# Altium PCB Copy of Synthesizer.PcbDoc
Units mm, origin at the board's own origin, x right, y up, seen from the top; angles counter-clockwise.
Board outline 62.91 x 80 mm, 2 copper layers (Top, Bottom), stack 1.536 mm thick; 36 components, 23 nets, 164 pads, 60 vias.
Unrouted connection lines stored in the file: 1.
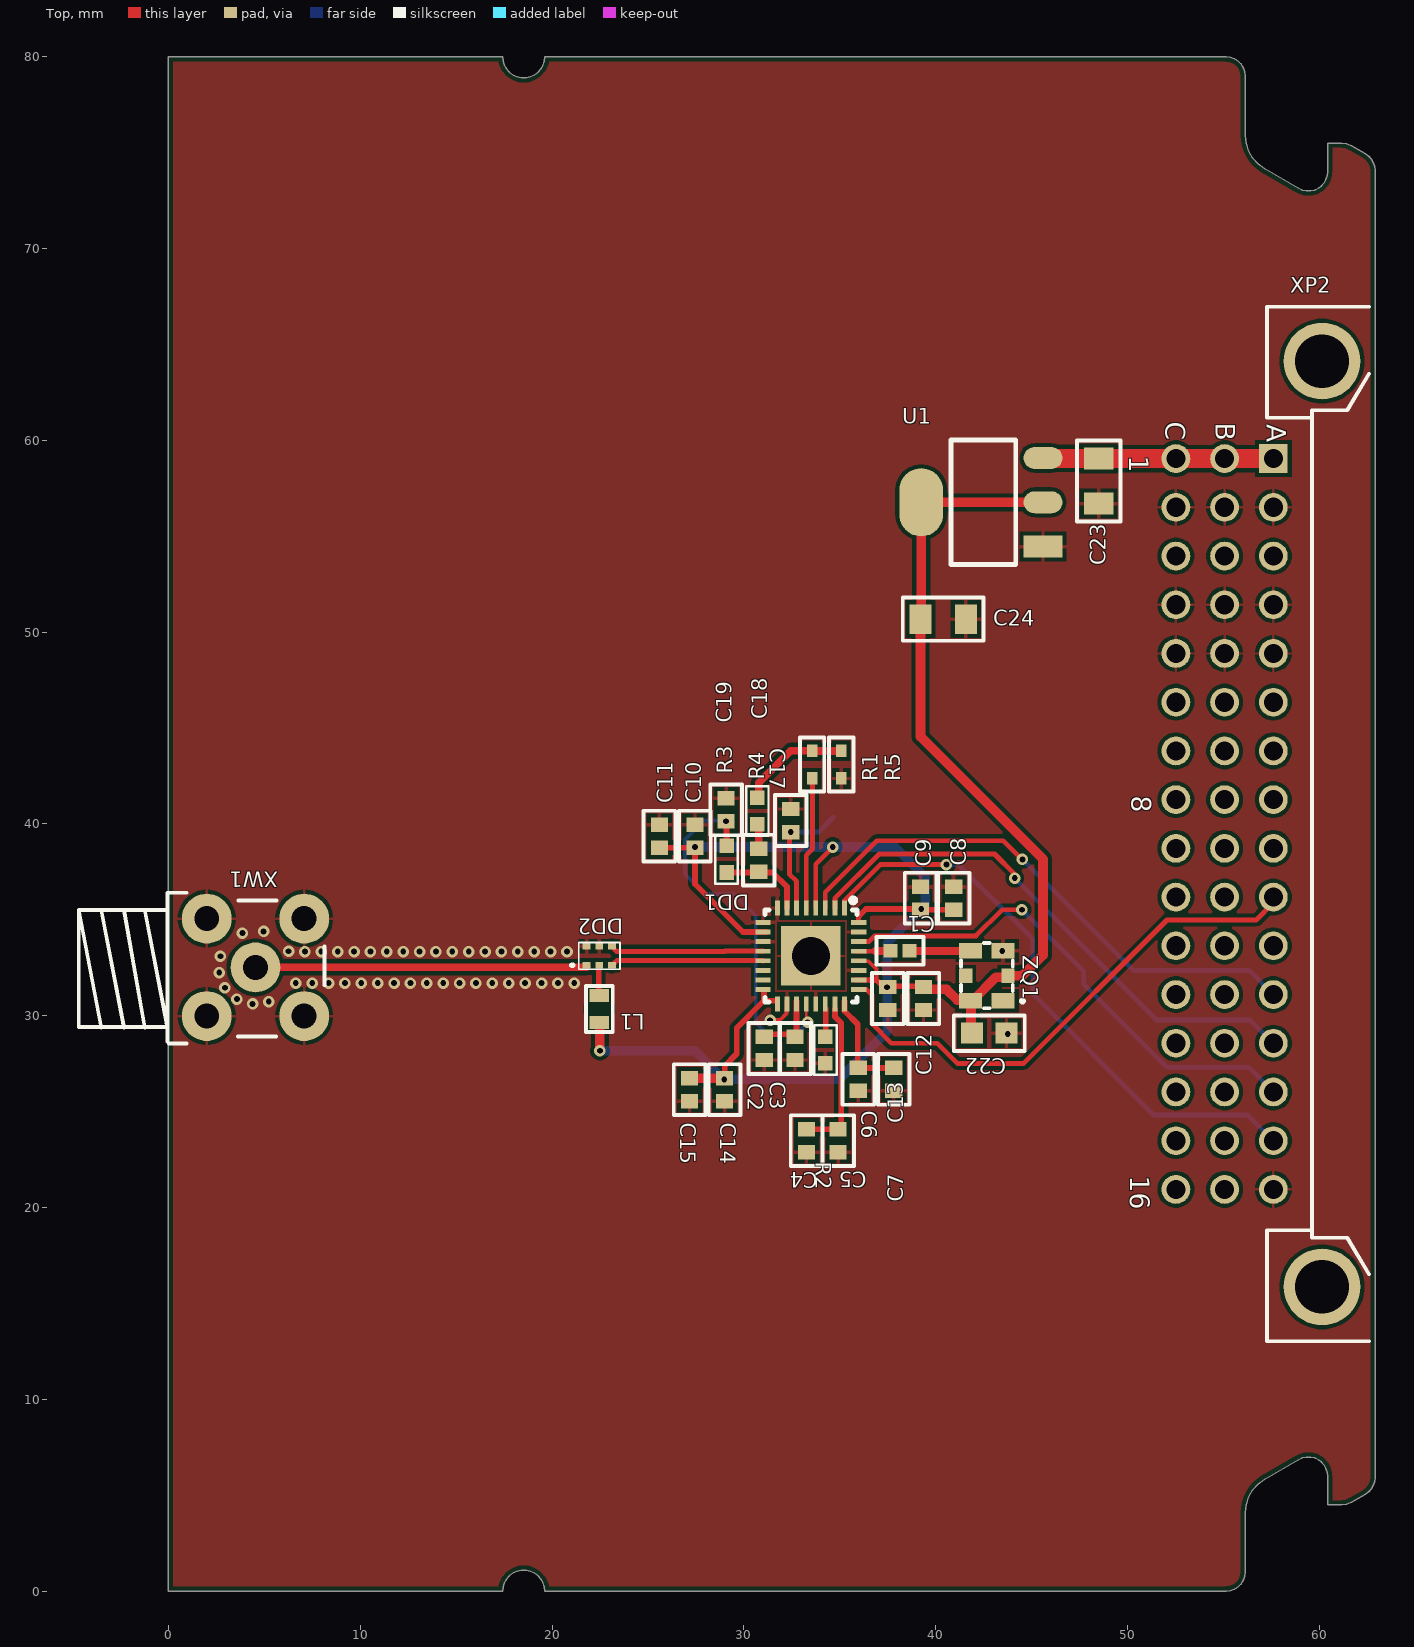
[diagram p0: Top view]
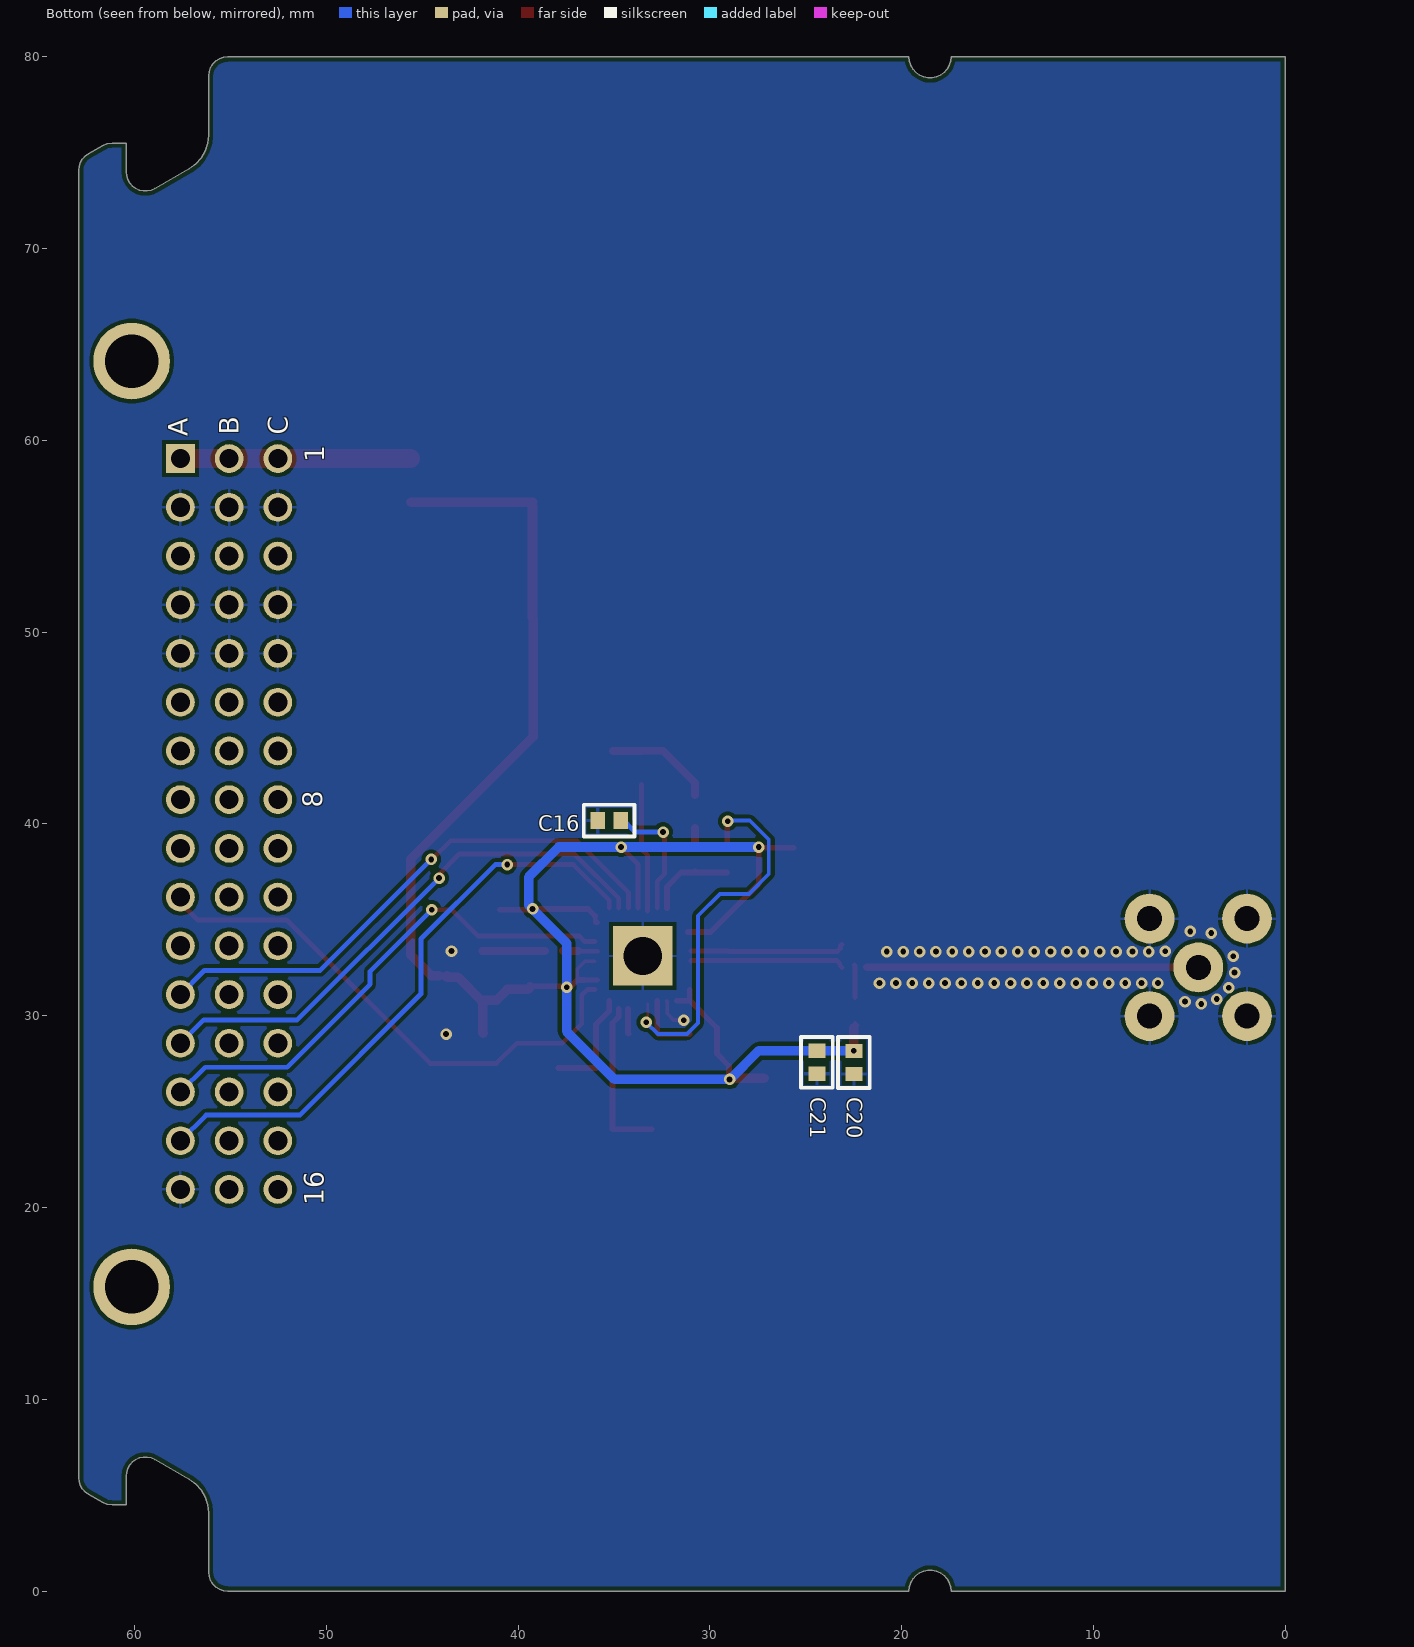
[diagram p1: Bottom view, seen from below]

## Layer stack, top to bottom
Top Solder: solder mask 0.0102, Solder Resist, Dk 3.5
Top: signal copper 0.018
Dielectric1: core 1.5, FR-4, Dk 4.8
Bottom: signal copper 0.018
Bottom Solder: solder mask 0.0102, Solder Resist, Dk 3.5

## Board outline
0,0 17.425,0 17.449,0.229 17.52,0.447 17.635,0.647 17.789,0.817 17.975,0.953 18.185,1.046 18.41,1.094 18.64,1.094 18.865,1.046 19.075,0.953 19.261,0.817 19.415,0.647 19.53,0.447 19.601,0.229 19.625,0 55.139,0 55.361,0.025 55.573,0.099 55.762,0.218 55.921,0.376 56.04,0.566 56.114,0.777 56.139,1 56.139,4.096 56.182,4.512 56.312,4.909 56.521,5.271 56.8,5.582 57.139,5.828 58.937,6.866 59.128,6.951 59.332,6.995 59.541,6.995 59.746,6.951 59.937,6.866 60.106,6.743 60.246,6.588 60.35,6.407 60.415,6.208 60.437,6 60.437,4.5 61.169,4.5 61.428,4.534 61.669,4.634 62.407,5.06 62.576,5.183 62.716,5.338 62.82,5.519 62.885,5.718 62.907,5.926 62.907,74.074 62.885,74.282 62.82,74.481 62.716,74.662 62.576,74.817 62.407,74.94 61.669,75.366 61.428,75.466 61.169,75.5 60.437,75.5 60.437,74 60.415,73.792 60.35,73.593 60.246,73.412 60.106,73.257 59.937,73.134 59.746,73.049 59.541,73.005 59.332,73.005 59.128,73.049 58.937,73.134 57.139,74.172 56.8,74.418 56.521,74.729 56.312,75.091 56.182,75.488 56.139,75.904 56.139,79 56.114,79.223 56.04,79.434 55.921,79.624 55.762,79.782 55.573,79.901 55.361,79.975 55.139,80 19.625,80 19.601,79.771 19.53,79.553 19.415,79.353 19.261,79.183 19.075,79.047 18.865,78.954 18.64,78.906 18.41,78.906 18.185,78.954 17.975,79.047 17.789,79.183 17.635,79.353 17.52,79.553 17.449,79.771 17.425,80 0,80

## Design rules (kind name [scope] priority, off if disabled: settings)
AcuteAngle [All] p1: minimum=3.50000000000000E+0001 checktracksonly=FALSE
BoardOutlineClearance "BoardOutlineClearance 1" [All] p1: gap=0.25 ignorepadtopadclearanceinfootprint=FALSE except(0: Arc-SplitContinuation Track-SplitContinuation SMDPad-SplitContinuation THPad-SplitContinuation Via-SplitContinuation Fill-SplitContinuation Poly-SplitContinuation Region-SplitContinuation Text-SplitContinuation) // Milling
BoardOutlineClearance "BoardOutlineClearance 2" [All] p2: gap=0.4 ignorepadtopadclearanceinfootprint=FALSE except(0: Arc-SplitContinuation Track-SplitContinuation SMDPad-SplitContinuation THPad-SplitContinuation Via-SplitContinuation Fill-SplitContinuation Poly-SplitContinuation Region-SplitContinuation Text-SplitContinuation) // V-Cut
Clearance "Clearance-1 1 Oz 35mkm" [All] p1 off: gap=0.2 ignorepadtopadclearanceinfootprint=FALSE except(0.25: Arc-Hole Track-Hole SMDPad-Hole THPad-Hole Via-Hole Fill-Hole Poly-Hole Region-Hole Text-Hole) // Standart
Clearance "Clearance-1 1/2 Oz 18mkm" [All] p2: gap=0.125 ignorepadtopadclearanceinfootprint=FALSE except(0.2: Arc-Fill Arc-Poly Track-Fill Track-Poly SMDPad-SMDPad SMDPad-Fill SMDPad-Poly THPad-Fill THPad-Poly Via-Fill Via-Poly Fill-Fill Fill-Poly Poly-Poly Poly-Region Poly-Text; 0.25: Arc-Hole Track-Hole SMDPad-Hole THPad-Hole Via-Hole Fill-Hole Poly-Hole Region-Hole Text-Hole) // Standart
DiffPairsRouting "DiffPairsRouting 1 Oz 35mkm" [All] p1 off: maxlimit=0.254 minlimit=0.2 mostfreqgap=0.254 toplayer_minwidth=0.2 toplayer_maxwidth=0.381 toplayer_prefwidth=0.381 bottomlayer_minwidth=0.2 bottomlayer_maxwidth=0.381 bottomlayer_prefwidth=0.381 maxuncoupledlength=12.7
DiffPairsRouting "DiffPairsRouting 1/2 Oz 18mkm" [All] p2: maxlimit=0.254 minlimit=0.125 mostfreqgap=0.254 toplayer_minwidth=0.125 toplayer_maxwidth=0.381 toplayer_prefwidth=0.381 bottomlayer_minwidth=0.125 bottomlayer_maxwidth=0.381 bottomlayer_prefwidth=0.381 maxuncoupledlength=12.7 // Standart
HoleSize "Minimum HoleSize" [IsPad] p1: absolutevalues=TRUE maxlimit=5.9 minlimit=0.6 maxpercent=80.000 minpercent=20.000
HoleSize "Minimum HoleSize VIA 1" [IsVia] p2: absolutevalues=TRUE maxlimit=5.9 minlimit=0.3 maxpercent=80.000 minpercent=20.000 // Standart
HoleSize "Minimum HoleSize VIA 2" [IsVia] p3 off: absolutevalues=TRUE maxlimit=5.9 minlimit=0.2 maxpercent=80.000 minpercent=20.000 // Advance
HoleToHoleClearance Hole2HoleClearance [All] p1: gap=0.25 allowstackedmicrovias=FALSE
MinimumAnnularRing "Minimum AR VIA Standart" [IsVia] p1: minimumring=0.15
MinimumAnnularRing "Minimum AR PAD Standart" [IsPAD] p2: minimumring=0.2
MinimumAnnularRing "Minimum AR VIA Advance" [IsVia] p3 off: minimumring=0.1
MinimumAnnularRing "Minimum AR PAD Advance" [IsPAD] p4 off: minimumring=0.15
MinimumSolderMaskSliver "SolderMask Bridge Standart" [All] p1: minsoldermaskwidth=0.14 // All Masks
MinimumSolderMaskSliver "SolderMask Bridge Advance" [All] p2 off: minsoldermaskwidth=0.1 // Mask LDI
PlaneClearance "PlaneClearance 1 Oz 35mkm" [All] p1 off: clearance=0.2
PlaneClearance "PlaneClearance-1 1/2 Oz 18mkm" [All] p2: clearance=0.2 // Standart
PlaneClearance "PlaneClearance-2 1/2 Oz 18mkm" [All] p3 off: clearance=0.15 // Advance
PlaneConnect "TermalConnect-1 1 Oz 35mkm" [All] p1 off: planeconnectstyle=Relief reliefexpansion=0.2 reliefentries=4 reliefconductorwidth=0.2 reliefairgap=0.2 // Standart
PlaneConnect "TermalConnect-2 1 Oz 35mkm" [All] p2 off: pad.planeconnectstyle=Relief pad.reliefexpansion=0.15 pad.reliefentries=4 pad.reliefconductorwidth=0.2 pad.reliefairgap=0.2 via.planeconnectstyle=Direct via.reliefexpansion=0.15 via.reliefentries=4 via.reliefconductorwidth=0.15 via.reliefairgap=0.15 // Advance
PlaneConnect "TermalConnect-1 1/2 Oz 18mkm" [All] p3: planeconnectstyle=Relief reliefexpansion=0.2 reliefentries=4 reliefconductorwidth=0.2 reliefairgap=0.2 // Standart
PlaneConnect "TermalConnect-2 1/2 Oz 18mkm" [All] p4 off: pad.planeconnectstyle=Relief pad.reliefexpansion=0.15 pad.reliefentries=4 pad.reliefconductorwidth=0.15 pad.reliefairgap=0.15 via.planeconnectstyle=Direct via.reliefexpansion=0.15 via.reliefentries=4 via.reliefconductorwidth=0.15 via.reliefairgap=0.15 // Advance
PolygonConnect "PolygonConnect-1 1 Oz 35mkm" [All] p1 off: thpad.connectstyle=Relief thpad.reliefconductorwidth=0.2 thpad.reliefentries=4 thpad.polygonreliefangle="90 Angle" thpad.airgapwidth=0.2 smdpad.connectstyle=Relief smdpad.reliefconductorwidth=0.2 smdpad.reliefentries=4 smdpad.polygonreliefangle="90 Angle" smdpad.airgapwidth=0.2 via.connectstyle=Direct via.reliefconductorwidth=0.254 via.reliefentries=4 via.polygonreliefangle="90 Angle" via.airgapwidth=0.254 // Standart
PolygonConnect "PolygonConnect-2 1 Oz 35mkm" [All] p2 off: thpad.connectstyle=Relief thpad.reliefconductorwidth=0.15 thpad.reliefentries=4 thpad.polygonreliefangle="90 Angle" thpad.airgapwidth=0.15 smdpad.connectstyle=Relief smdpad.reliefconductorwidth=0.15 smdpad.reliefentries=4 smdpad.polygonreliefangle="90 Angle" smdpad.airgapwidth=0.15 via.connectstyle=Direct via.reliefconductorwidth=0.254 via.reliefentries=4 via.polygonreliefangle="90 Angle" via.airgapwidth=0.254 // Advance
PolygonConnect "PolygonConnect-1 1/2 Oz 18mkm" [All] p3: thpad.connectstyle=Relief thpad.reliefconductorwidth=0.15 thpad.reliefentries=4 thpad.polygonreliefangle="90 Angle" thpad.airgapwidth=0.2 smdpad.connectstyle=Relief smdpad.reliefconductorwidth=0.2 smdpad.reliefentries=4 smdpad.polygonreliefangle="90 Angle" smdpad.airgapwidth=0.2 via.connectstyle=Direct via.reliefconductorwidth=0.254 via.reliefentries=4 via.polygonreliefangle="90 Angle" via.airgapwidth=0.254 // Standart
PolygonConnect "PolygonConnect-2 1/2 Oz 18mkm" [All] p4 off: thpad.connectstyle=Relief thpad.reliefconductorwidth=0.125 thpad.reliefentries=4 thpad.polygonreliefangle="90 Angle" thpad.airgapwidth=0.15 smdpad.connectstyle=Relief smdpad.reliefconductorwidth=0.125 smdpad.reliefentries=4 smdpad.polygonreliefangle="90 Angle" smdpad.airgapwidth=0.15 via.connectstyle=Direct via.reliefconductorwidth=0.254 via.reliefentries=4 via.polygonreliefangle="90 Angle" via.airgapwidth=0.254 // Advance
RoomDefinition Synthesizer [InComponentClass('Synthesizer')] p1: confinementstyle=ConfineIn formatcopy=TRUE lockcomponents=FALSE outline -920.36,-680.748 -869.56,-680.748 -869.56,-655.348 -920.36,-655.348
RoutingCorners [All] p1 off: cornerstyle=45-Degree minsetback=2.54 maxsetback=2.54
RoutingVias [All] p1: holewidth=0.3 width=0.6 viastyle="Through Hole" minholewidth=0.2 minwidth=0.4 maxholewidth=5.9 maxwidth=6.4
SilkToSilkClearance Silk2SilkClearance [All] p1 off: silktosilkclearance=0.15
SilkToSolderMaskClearance Silk2SolderMaskClearance [IsPad] p1 off: minsilkscreentomaskgap=0.15 clearancetoexposedcopper=TRUE
SolderMaskExpansion SolderMaskExpansion-1 [All] p1: expansion=0.05 istentingtop=FALSE // Standart
SolderMaskExpansion "SolderMaskExpansion LDI" [All] p2 off: expansion=0.025 istentingtop=FALSE // Advance
Width "Width 1 Oz 35mkm" [All] p1 off: maxlimit=10 minlimit=0.15 preferedwidth=0.2 checkconnectedcopper=TRUE // Standart
Width "Width 1/2 Oz 18mkm" [All] p2: maxlimit=10 minlimit=0.1 preferedwidth=0.125 checkconnectedcopper=TRUE // Standart
21 further rules are at their usual default settings.

## Classes and differential pairs
net class 50_Om: NetDD2_1 RFOutA_N RFOutA_P
differential pair RFOutA: +RFOutA_P -RFOutA_N

## Components (designator, comment, footprint, x,y, rotation, side; value= is the part's Value field where it differs from the comment)
C1 "Capacitors" "SMD 0402 (1005) max" 38.145,33.39 r180 top value=100pF
C2 "Capacitors" "SMD 0603 (1608) min" 31.07,28.298 r270 top value=0.1uF
C3 "Capacitors" "SMD 0603 (1608) min" 32.67,28.298 r270 top value=10pF
C4 "Capacitors" "SMD 0603 (1608) min" 33.271,23.49 r270 top value=0.1uF
C5 "Capacitors" "SMD 0603 (1608) min" 34.915,23.49 r270 top value=10pF
C6 "Capacitors" "SMD 0603 (1608) min" 35.971,26.684 r270 top value=0.1uF
C7 "Capacitors" "SMD 0603 (1608) min" 37.815,26.684 r270 top value=10pF
C8 "Capacitors" "SMD 0603 (1608) min" 40.944,36.133 r90 top value=0.1uF
C9 "Capacitors" "SMD 0603 (1608) min" 39.212,36.133 r270 top value=10pF
C10 "Capacitors" "SMD 0603 (1608) min" 27.451,39.363 r90 top value=0.1uF
C11 "Capacitors" "SMD 0603 (1608) min" 25.598,39.365 r270 top value=10pF
C12 "Capacitors" "SMD 0603 (1608) min" 39.364,30.902 r270 top value=0.1uF
C13 "Capacitors" "SMD 0603 (1608) min" 37.51,30.902 r90 top value=10pF
C14 "Capacitors" "SMD 0603 (1608) min" 28.998,26.152 r270 top value=0.1uF
C15 "Capacitors" "SMD 0603 (1608) min" 27.171,26.152 r90 top value=10pF
C16 "Capacitors" "SMD 0603 (1608) min" 35.25,40.179 r0 bottom value=0.1uF
C17 "Capacitors" "SMD 0603 (1608) min" 32.446,40.179 r270 top value=10pF
C18 "Capacitors" "SMD 0603 (1608) min" 30.778,38.119 r90 top value=39nF
C19 "Capacitors" "SMD 0603 (1608) min" 29.076,40.743 r270 top value=1200pF
C20 "Capacitors" "SMD 0603 (1608) min" 22.491,27.567 r270 bottom value=0.1uF
C21 "Capacitors" "SMD 0603 (1608) min" 24.422,27.577 r90 bottom value=10nF
C22 "Capacitors" "SMD 0603 (1608) max" 42.794,29.097 r180 top value=0.1uF
C23 "VJ0805Y104KXBTW1BC" "0805 (2012)" 48.5,57.882 r90 top value=100nF
C24 "VJ0805V106ZXQTW1BC" "0805 (2012)" 40.392,50.68 r180 top value=10uF
DD1 "ADF4351BCPZ" "LFCSP-32  Long Pin - with VIA" 33.5,33.12 r270 top
DD2 "BD1631J50100AHF" 0805_a 22.466,33.124 r180 top
L1 "0603HP-18NXJE" 0603HP 22.466,30.356 r270 top
R1 "Resistor" "Resistor SMD 0603 (1608) min" 33.557,43.098 r270 top value=1R
R2 "4K7" 0603R-4K7 34.25,27.521 r90 top
R3 "680" 0603R-4K7 29.102,37.469 r90 top
R4 "120" 0603R-4K7 30.702,39.981 r90 top
R5 "Resistor" "Resistor SMD 0603 (1608) min" 35.081,43.098 r270 top value=360
U1 "LD1117S33TR" SOT-223 42.424,56.771 r90 top
XP2 "09 23 148 6921" "09 23 148 6921" 56.337,40 r270 top locked
XW1 "J01151A0201" J01151A0201 4.54,32.526 r90 top
ZQ1 "ГК1010-TK" DIL-8 42.674,32.093 r90 top

## Footprints (in the part's own frame and the unit in brackets; to place one, negate y for a bottom-side part, rotate by r counter-clockwise, add the part's x,y. Pads: shape width x height; smd on the part's side, far side on the other; paste and mask are expansions set on the pad)
"09 23 148 6921" [mm]
  rect 1.5x1.5 hole 1: a1(-19.05,1.27)
  round 1.5 hole 1: a2(-16.51,1.27) a3(-13.97,1.27) a4(-11.43,1.27) a5(-8.89,1.27) a6(-6.35,1.27) a7(-3.81,1.27) a8(-1.27,1.27) a9(1.27,1.27) a10(3.81,1.27) a11(6.35,1.27) a12(8.89,1.27) a13(11.43,1.27) a14(13.97,1.27) a15(16.51,1.27) a16(19.05,1.27) b1(-19.05,-1.27) b2(-16.51,-1.27) b3(-13.97,-1.27) b4(-11.43,-1.27) b5(-8.89,-1.27) b6(-6.35,-1.27) b7(-3.81,-1.27) b8(-1.27,-1.27) b9(1.27,-1.27) b10(3.81,-1.27) b11(6.35,-1.27) b12(8.89,-1.27) b13(11.43,-1.27) b14(13.97,-1.27) b15(16.51,-1.27) b16(19.05,-1.27) c1(-19.05,-3.81) c2(-16.51,-3.81) c3(-13.97,-3.81) c4(-11.43,-3.81) c5(-8.89,-3.81) c6(-6.35,-3.81) c7(-3.81,-3.81) c8(-1.27,-3.81) c9(1.27,-3.81) c10(3.81,-3.81) c11(6.35,-3.81) c12(8.89,-3.81) c13(11.43,-3.81) c14(13.97,-3.81) c15(16.51,-3.81) c16(19.05,-3.81)
  round 4 hole 2.8: MH(-24.13,3.81) MH(24.13,3.81)
  silkscreen extent -26.97,0.94 26.97,6.25, body extent -27.02,-4.1 26.98,13.92, height 9.45
0603HP [mm]
  rect 0.69x1.02 smd mask+0.04: 1(-0.7,0) 2(0.7,0)
  silkscreen extent -1.2,-0.7 1.2,0.7, body extent -0.87,-0.54 0.88,0.55, height 0.93
0603R-4K7 [mil] "RESISTOR 0603"
  rect 30x30 smd: 1(0,0) 2(55,0)
  silkscreen extent -23,-23 78,23, body extent -4,-15 59,15, height 20
"0805 (2012)" [mm]
  rect 1.15x1.55 smd: 1(-1.18,0) 2(1.18,0)
  silkscreen extent -2.11,-1.13 2.11,1.13, body extent -0.99,-0.62 1.01,0.62, height 1.3
0805_a [mm]
  rect 0.41x0.33 smd mask+0.05: 1(0.66,0.495) 2(0,0.495) 3(-0.66,0.495) 4(-0.66,-0.495) 5(0,-0.495) 6(0.66,-0.495)
  silkscreen extent -1.07,-0.7 1.43,0.7, body extent -1.02,-0.64 1.02,0.64, height 0.68
DIL-8 [mm]
  rect 0.8x1.2 smd mask+0.01: 1(-1.305,-0.85) 3(1.305,-0.85) 4(1.305,0.85) 6(-1.305,0.85)
  rect 0.75x0.7 smd mask+0.01: 2(0,-1.1) 5(0,1.1)
  silkscreen extent -1.7,-1.92 1.7,1.35, body extent -1.6,-1.25 1.6,1.25, height 1.64
J01151A0201 [mm]
  round 2.6 hole 1.3: 1(0,0) 2(-2.54,-2.54) 2(-2.54,2.54) 2(2.54,-2.54) 2(2.54,2.54)
  silkscreen extent -3.97,-3.59 3.89,9.21, body extent -5.17,-3.5 5.03,35.78, height 10.85
"LFCSP-32  Long Pin - with VIA" [mm]
  rect 0.8x0.25 smd mask+0.05: 1(-2.5,1.75) 2(-2.5,1.25) 3(-2.5,0.75) 4(-2.5,0.25) 5(-2.5,-0.25) 6(-2.5,-0.75) 7(-2.5,-1.25) 8(-2.5,-1.75) 17(2.5,-1.75) 18(2.5,-1.25) 19(2.5,-0.75) 20(2.5,-0.25) 21(2.5,0.25) 22(2.5,0.75) 23(2.5,1.25) 24(2.5,1.75)
  rect 0.25x0.8 smd mask+0.05: 9(-1.75,-2.5) 10(-1.25,-2.5) 11(-0.75,-2.5) 12(-0.25,-2.5) 13(0.25,-2.5) 14(0.75,-2.5) 15(1.25,-2.5) 16(1.75,-2.5) 25(1.75,2.5) 26(1.25,2.5) 27(0.75,2.5) 28(0.25,2.5) 29(-0.25,2.5) 30(-0.75,2.5) 31(-1.25,2.5) 32(-1.75,2.5)
  rect 3.1x3.1 hole 2 mask+0.05: 33(0,0)
  silkscreen extent -3.03,-2.4 2.4,2.4, body extent -2.51,-2.51 2.51,2.51, height 0.8
"Resistor SMD 0603 (1608) min" [mm]
  rect 0.65x0.55 smd: 1(-0.725,0) 2(0.725,0)
  silkscreen extent -1.41,-0.64 1.41,0.64, body extent -0.8,-0.4 0.8,0.4, height 0.45
"SMD 0402 (1005) max" [mm]
  rect 0.72x0.72 smd: 1(-0.5,0) 2(0.5,0)
  silkscreen extent -1.22,-0.72 1.22,0.72, body extent -0.5,-0.25 0.5,0.25, height 0.5
"SMD 0603 (1608) max" [mm]
  rect 1.15x1.1 smd: 1(-0.9,0) 2(0.9,0)
  silkscreen extent -1.85,-0.92 1.85,0.92, body extent -0.8,-0.4 0.8,0.4, height 0.5
"SMD 0603 (1608) min" [mm]
  rect 0.75x0.9 smd: 1(-0.6,0) 2(0.6,0)
  silkscreen extent -1.33,-0.82 1.33,0.82, body extent -0.8,-0.4 0.8,0.4, height 0.5
SOT-223 [mil]
  rect 45x80 smd: 1(-90.94,-125)
  oval 140x90 smd: 2(0,125)
  oval 45x80 smd: 2(0,-125) 3(90.94,-125)
  silkscreen extent -128,-69 128,64, body extent -128,-140 128,140, height 65

## Part data
C1 C2 C3 C4 C5 C6 C7 C8 C9 C10 C11 C12 C13 C14 C15 C16 C17 C18 C19 C20 C21 C22: "Capacitor", Tolerance=±10%, Category=Конденсаторы
C23: "Ceramic Capacitor  0.1uF 100V", Case/Package=0805, Dielectric=X7R, Dielectric Material=Tantalum, Manufacturer="Vishay Vitramon", Max Operating Temperature=125°C, Min Operating Temperature=-55°C, Supplier Part Number 1=2896560, Tolerance=10%, Voltage Rating (DC)=100V, Category=Конденсаторы, ComponentLink1Description=http://www.vishay.com/docs/28548/vjw1bcbascomseries.pdf, ComponentLink1URL=http://www.vishay.com/docs/28548/vjw1bcbascomseries.pdf, Depth=1.25mm, Lead Free="Lead Free", Length=2mm, Manufacturer Part Number=VJ0805Y104KXBTW1BC, Mount="Surface Mount", Packaging="Tape and Reel", Pricing 1="5=0.0806, 50=0.0509, 250=0.0369, 500=0.0317 (RUB)", Radiation Hardening=No, Stock 1=0, Supplier 1=Farnell, Разработчик="Богатов Алексей"
C24: "Ceramic Capacitors 10uF 10volts", Case/Package=0805, Dielectric=Y5V, Dielectric Material=Tantalum, Manufacturer="Vishay Vitramon", Max Operating Temperature=85°C, Min Operating Temperature=-30°C, Supplier Part Number 1=VJ0805V106ZXQTW1BC-ND, Tolerance=80%, Voltage Rating (DC)=10V, Category=Конденсаторы, ComponentLink1Description=http://www.vishay.com/docs/28548/vjw1bcbascomseries.pdf, ComponentLink1URL=http://www.vishay.com/docs/28548/vjw1bcbascomseries.pdf, Lead Free="Lead Free", Manufacturer Part Number=VJ0805V106ZXQTW1BC, Mount="Surface Mount", Pricing 1="3000=0.1089 (USD)", Stock 1=0, Supplier 1=Digi-Key, Разработчик="Богатов Алексей"
DD1: "Phase Locked Loops - PLL WB Synthesizer w/ Intg VCO", Case/Package=LFCSP-32, Frequency=4.4GHz, Manufacturer="Analog Devices", Max Operating Temperature=85°C, Min Operating Temperature=-40°C, Min Supply Voltage=3V, Nominal Supply Current=110mA, Operating Supply Voltage=3.3V, Category=Микросхемы, ComponentLink1Description=datasheet, ComponentLink1URL=https://www.analog.com/media/en/technical-documentation/data-sheets/ADF4351.pdf, ComponentLink2Description=Mouser, ComponentLink2URL=https://ru.mouser.com/ProductDetail/Analog-Devices/ADF4351BCPZ?qs=BpaRKvA4VqFCiUOrGPcIQw%3D%3D, Input=CMOS, Interface=SPI, Manufacturer Part Number=ADF4351BCPZ, Max Frequency=4.4GHz, PLL=Yes, Разработчик="Леткин Д.С."
DD2: "The BD1631J50100AHF is a low profile sub-miniature balanced to unbalanced / transformer designed for differential inputs and output locations on next generation / wireless chipsets in an easy to use surface mount package covering 802.11b+g+n, / GSM, DCS, PCS and UMTS.", Case Code (Imperial)=0805, Frequency="1.6 - 3.1GHz", Manufacturer=Anaren, Max Operating Temperature=85°C, Min Operating Temperature=-55°C, Category=Микросхемы, ComponentLink1Description=datasheet, ComponentLink1URL=https://cdn.anaren.com/product-documents/Xinger/BalunTransformers/BD1631J50100AHF/BD1631J50100AHF_DataSheet(Rev_K).pdf, ComponentLink2Description=Anaren, ComponentLink2URL=https://www.anaren.com/catalog/xinger/subminiature-components, Contact Plating=Gold, Impedance=100R, Insertion Loss=0.6dB, Manufacturer Part Number=BD1631J50100AHF, Number of Pins=6, Разработчик="Леткин Д.С."
L1: "Ceramic Chip Inductors", Manufacturer=Coilcraft, Category="Катушки индуктивности", ComponentLink1Description=datasheet, ComponentLink1URL=https://www.coilcraft.com/pdfs/0603hp.pdf, ComponentLink2Description=Coilcraft, ComponentLink2URL=https://www.coilcraft.com/0603hp.cfm, Manufacturer Part Number=0603HP-18NXJE, Разработчик="Леткин Д.С."
R1 R5: library part Resistors, Category=Резисторы
R2 R3 R4: library part 0603R-4K7, "GENERIC RESISTOR 0603", Manufacturer="Stackpole Electronics Inc", Manufacturer Part Number="RMCF 1/16 4.7K 1% R", Supplier Part Number 1=RMCF0603FT4K70TR-ND, Reel=R23, Supplier 1=Digi-Key
U1: library part LD1117S50TR, Base Part Number=LD1117, Current - Output=800mA, Manufacturer=STMicroelectronics, Operating Temperature="0°C ~ 125°C", Package / Case="TO-261-4, TO-261AA", Supplier Device Package=SOT-223, Supplier Part Number 1=497-6447-1-ND, Voltage - Input (Max)=15V, Voltage - Output (Max)=-, Voltage - Output (Min/Fixed)=5V, Voltage Dropout (Max)="1.2V @ 800mA", Category="Integrated Circuits (ICs)", ComponentLink1Description=http://www.st.com/content/ccc/resource/technical/document/datasheet/99/3b/7d/91/91/51/4b/be/CD00000544.pdf/files/CD00000544.pdf/jcr:content/translations/en.CD00000544.pdf, ComponentLink1URL=http://www.st.com/content/ccc/resource/technical/document/datasheet/99/3b/7d/91/91/51/4b/be/CD00000544.pdf/files/CD00000544.pdf/jcr:content/translations/en.CD00000544.pdf, Control Features=-, Manufacturer Part Number=LD1117S50TR, Mounting Type="Surface Mount", Output Configuration=Positive, Output Type=Fixed, Packaging="Cut Tape (CT)", Part Status=Active, Pricing 1="1=0.51, 10=0.411, 100=0.2802, 500=0.21012, 1000=0.15759 (USD)", Protection Features="Over Current, Over Temperature", PSRR="75dB (120Hz)", RoHS="RoHS Compliant", Stock 1=3876, Supplier 1=Digi-Key
XP2: "DIN-Signal 2C048MS-1C1-2", Current Rating=-, Manufacturer=HARTING, Manufacturer Part Number=09231486921, Material Flammability Rating="UL94 V-0", Category=Разъёмы, ComponentLink1Description=Datasheet, ComponentLink1URL=https://b2b.harting.com/files/download/PRD/PDF_DS/09031200201_100580147DRW000B.pdf, Connector Type="Header, Male Pins", Contact Finish=-, Contact Finish Thickness=-, Features=-, Function="просто так", HelpURL=https://b2b.harting.com/ebusiness/en_us/DIN-Signal-2C048MS-1C1-2/09231486921, Material - Insulation="Thermoplastic resin, Glass-fibre Filled", Mounting Type="Through Hole, Right Angle", Number of Contacts=48, Number of Positions Loaded=All, Operating Temperature=-, Packaging=Bulk, Packaging size=20, Part Status=Active, Pitch="0.100\" (2.54mm)", RoHS="RoHS Compliant", Style=C, Termination=Solder, Разработчик="Леткин Д."
XW1: "Telegartner Right Angle 50Ohm Thru Hole SMA Connector,  jack,  Solder Termination", Manufacturer=Telegartner, Supplier Part Number 1=70884022, Category=Разъёмы, ComponentLink1Description=https://www.alliedelec.com/m/d/98f426e0d5bb6ee5532bde4cab502770.pdf, ComponentLink1URL=https://www.alliedelec.com/m/d/98f426e0d5bb6ee5532bde4cab502770.pdf, ComponentLink2Description=https://www.alliedelec.com/-j01151a0201/70884022/, ComponentLink2URL=https://www.alliedelec.com/-j01151a0201/70884022/, Manufacturer Part Number=J01151A0201, Pricing 1="1=11.2500 (USD)", RoHS=No, Stock 1=509, Supplier 1=Allied
ZQ1: "Генераторы кварцевые программируемые", Case/Package="DIL 8", Manufacturer="БМГ ПЛЮС", Category=Фильтры, ComponentLink1Description=datasheet, ComponentLink1URL=http://bmgplus.ru/images/pdf/pdf1010_tcxo.pdf, Manufacturer Part Number=ГК1010-TK, Джиттер, пс=0,8, Нагрузка, пФ=15, Питание,В=3.3, Потребляемый ток, мA=35, Разработчик="Леткин Д.С.", Частота, МГц="10 - 250"

## Via types
v1: diameter 0.6, hole 0.3, Top to Bottom, tented both sides, 60 vias

## Nets (pads, with @x,y where several pads share a name; then routed paths per layer and width w, separated by ;. In a path a pad name is that pad's centre, name@x,y a point inside that pad or via, vN(x,y) a via of type N, cw(c..) or ccw(c..) an arc to the next point about the centre after c; other vN are vias at no path point)
+3.3V: C8.1 C9.2 C10.1 C11.2 C12.1 C13.2 C14.1 C15.2 C16.1 C17.2 C20.1 C21.2 C22.2 C24.2 DD1.4 DD1.6 DD1.10 DD1.16 DD1.17 DD1.26 DD1.28 DD1.32 L1.2 U1.2 ZQ1.2 ZQ1.6 | length 118.4
  Top w0.125: L1.2 22.415,29.656 22.261,29.502 22.368,29.502 L1.2@22.496,29.374 ; v1@22.496,28.172 v1(22.501,28.177) ; C24.2 C24.2@39.249,50.717
  Top w0.2: DD1.28@36.025,32.845 36.506,32.845 36.916,32.435 36.916,31.87
  Top w0.25: v1(32.446,39.579) 32.375,39.508 32.375,37.381 32.75,37.006 DD1.6 ; DD1.4 33.75,37.902 34.631,38.783 v1(34.631,38.799) ; DD1.26@35.85,31.87 DD1.26 36.47,31.87 ; DD1.32@35.85,34.87 35.975,34.87 35.975,35.182 35.999,35.206
  Top w0.3: C11.2@25.632,38.763 C10.1 ; v1(27.458,38.799) 27.451,38.792 C10.1 ; C14.1 29.001,26.755 29.001,27.39 29.628,28.017 29.628,29.369 31.05,30.791 ; DD1.16@31.05,31.345 31.05,30.791 ; DD1.10@31.15,34.37 DD1.10 29.957,34.37 27.451,36.876 C10.1 ; DD1.17@31.729,30.791 31.05,30.791 ; 35.999,35.206 36.364,35.571 v1(39.249,35.571) 39.287,35.533 C8.1 ; 36.57,31.87 36.916,31.87 C13.2@37.232,31.553 ; C13.2@37.51,31.553 39.365,31.547 C12.1@39.441,31.547
  Top w0.5: v1@22.496,28.172 L1.2@22.496,29.374 ; C15.2 C14.1 ; C24.2 39.212,44.552 45.599,38.165 45.599,33.161 44.53,32.093 44.124,32.093 ; C24.2@39.249,50.717 U1.2@39.249,56.57 ; U1.2@39.249,56.771 U1.2@45.599,56.771 ; C12.1 39.489,31.377 40.564,31.377 41.129,30.813 ZQ1.6@41.874,30.813 ; C22.2@41.814,29.097 41.844,29.128 41.844,30.782 ZQ1.6@41.874,30.813 ; ZQ1.2@43.724,32.093 43.724,32.018 43.146,32.018 41.941,30.813 ZQ1.6@41.874,30.813
  Bottom w0.125: C20.1 v1(22.501,28.177)
  Bottom w0.25: v1(32.446,39.579) 33.891,39.579 C16.1@34.65,40.338
  Bottom w0.5: v1(22.501,28.177) C21.2 27.458,28.177 28.95,26.684 v1(28.976,26.684) 34.969,26.684 37.47,29.185 v1(37.47,31.485) 37.47,33.792 v1(39.249,35.571) 39.454,35.776 39.454,37.227 37.882,38.799 v1(34.631,38.799) 34.604,38.799 v1(27.458,38.799)
+6V: C23.2 U1.3 XP2.a1 XP2.b1 XP2.c1 | length 12
  Top w1: U1.3@45.618,59.062 C23.2 ; C23.2@48.512,59.05 XP2.c1 XP2.b1 XP2.a1
CLK: DD1.1 XP2.a15 | length 31.2
  Top w0.25: DD1.1 35.25,36.02 37.117,37.887 v1(40.564,37.887)
  Bottom w0.25: v1(40.564,37.887) 41.189,37.887 45.064,34.012 45.064,31.139 51.376,24.827 56.27,24.827 XP2.a15
DATA: DD1.2 XP2.a13 | length 28.5
  Top w0.25: DD1.2 34.75,36.123 37.063,38.437 43.068,38.437 44.124,37.381 v1(44.124,37.18)
  Bottom w0.25: v1(44.124,37.18) 51.515,29.789 56.388,29.789 XP2.a13
GND: C2.2 C3.2 C4.2 C5.2 C6.2 C7.2 C8.2 C9.1 C10.2 C11.1 C12.2 C13.1 C14.2 C15.1 C16.2 C17.1 C19.1 C20.2 C21.1 C22.1 C23.1 C24.1 DD1.8 DD1.9 DD1.11 DD1.18 DD1.21 DD1.27 DD1.31 DD1.33 DD2.5 DD2.6 R2.1 R5.2 U1.1 XP2.a2 XP2.a4 XP2.a5 XP2.a16 XP2.b2 XP2.b4 XP2.b5 XP2.c2 XP2.c4 XP2.c5 XW1.2 ZQ1.3 | length 1.7
  Top w0.2: v1(31.369,29.77) 31.388,29.789 31.897,29.789 32.225,30.117 32.225,30.745 DD1.18@32.25,30.77
  other v1: 43.759,29.047 4.388,30.618 5.233,30.744 3.574,30.875 2.95,31.458 6.642,31.709 7.496,31.709 8.35,31.709 9.204,31.709 10.058,31.709 10.912,31.709 11.766,31.709 12.62,31.709 13.474,31.709 14.328,31.709 15.182,31.709 16.036,31.709 16.89,31.709 17.744,31.709 18.598,31.709 19.452,31.709 20.306,31.709 21.16,31.709 2.647,32.257 2.712,33.109 7.117,33.35 7.971,33.35 8.825,33.35 9.679,33.35 10.533,33.35 11.387,33.35 12.241,33.35 13.095,33.35 13.949,33.35 14.803,33.35 15.657,33.35 16.511,33.35 17.365,33.35 18.219,33.35 19.073,33.35 19.927,33.35 20.781,33.35 6.264,33.361 43.474,33.373 3.86,34.314 4.959,34.4
LD: DD1.25 XP2.a10 | length 28
  Top w0.25: DD1.25 36.4,31.37 36.685,31.084 36.685,29.577 37.693,28.57 40.08,28.57 41.129,27.521 44.589,27.521 52.062,34.995 56.71,34.995 57.607,35.891 XP2.a10 XP2.a10@57.465,36.19
LE: DD1.3 XP2.a12 | length 28.6
  Top w0.25: DD1.3 34.25,36.444 36.936,39.13 43.524,39.13 44.499,38.155 v1(44.524,38.155)
  Bottom w0.25: v1(44.524,38.155) 50.314,32.365 56.352,32.365 XP2.a12
MUXOUT: DD1.30 XP2.a14 | length 26.6
  Top w0.25: DD1.30 36.521,33.87 36.819,34.168 42.097,34.168 43.462,35.533 v1(44.499,35.533)
  Bottom w0.25: v1(44.499,35.533) 47.717,32.314 47.717,31.654 52.048,27.323 56.313,27.323 XP2.a14
NetC1_2: C1.2 DD1.29 | length 1.8
  Top w0.25: DD1.29@35.85,33.37 DD1.29 36.85,33.37
  Top w0.41: 36.85,33.37 C1.2@37.625,33.37
  Top w0.43: C1.2@37.625,33.37 C1.2
NetC2_1: C2.1 C3.1 DD1.19 | length 3.4
  Top w0.3: C2.1@31.07,29.044 32.67,29.044 32.75,29.124 DD1.19 DD1.19@32.75,30.77
NetC4_1: C4.1 C5.1 DD1.23 | length 8.5
  Top w0.3: C4.1@33.032,24.09 35.078,24.09 35.078,29.628 34.751,29.955 DD1.23@34.751,30.37
NetC6_1: C6.1 C7.1 DD1.24 | length 5.7
  Top w0.3: DD1.24@35.25,30.77 35.25,30.246 35.935,29.562 35.935,27.284 C7.1@37.913,27.284
NetC18_1: C18.1 DD1.7 R3.1 | length 4.6
  Top w0.3: R3.1 30.729,37.469 C18.1 ; C18.1@30.778,37.53 30.84,37.468 31.502,37.468 32.245,36.726 32.245,35.625 DD1.7
NetC18_2: C18.2 R4.1 | length 0.9
  Top w0.4: C18.2@30.778,38.874 R4.1@30.778,39.809
NetC19_2: C19.2 DD1.20 R3.2 | length 19.9
  Top w0.125: v1@33.25,29.733 DD1.20
  Top w0.3: v1(29.076,40.143) 29.102,40.117 R3.2@29.102,38.889
  Bottom w0.2: v1(29.076,40.143) 29.04,40.179 27.928,40.179 26.933,39.184 26.933,37.394 27.97,36.358 29.478,36.358 30.62,35.216 30.62,29.623 31.199,29.044 32.71,29.044 v1(33.325,29.659)
NetDD1_5: DD1.5 R1.2 | length 6.7
  Top w0.25: DD1.5@33.25,35.47 33.25,38.359 33.573,38.682 33.573,42.046 R1.2@33.556,42.063
NetDD1_22: DD1.22 R2.2 | length 1.3
  Top w0.3: R2.2@34.25,29.064 34.275,29.089 DD1.22@34.275,30.37
NetDD2_1: DD2.1 XW1.1 | length 17.3
  Top w0.41: XW1.1@4.54,32.529 20.444,32.529 DD2.1@21.806,32.529
NetDD2_2: DD2.2 L1.1 | length 1.7
  Top w0.28: L1.1@22.44,30.96 22.44,32.604 DD2.2
REF_IN: C1.1 ZQ1.4 | length 3.3
  Top w0.41: C1.1@38.602,33.373 ZQ1.4@41.874,33.373
RFOutA_N: DD1.13 DD2.3 | length 7.9
  Top w0.26: DD2.3@23.126,32.529 DD2.3@23.201,32.604 ; DD2.3@23.233,32.727 23.38,32.875 29.019,32.875 30.995,32.875 DD1.13
RFOutA_P: DD1.12 DD2.4 | length 8.1
  Top w0.26: DD2.4@23.126,33.719 23.201,33.644 23.201,33.522 23.358,33.365 29.014,33.365 29.019,33.37 DD1.12
SW: R1.1 R4.2 R5.1 | length 5.6
  Top w0.4: R4.2@30.778,41.514 30.778,42.153 32.446,43.822 33.544,43.822 33.556,43.81 R5.1@35.064,43.81
pads on no net: DD1.14 DD1.15 XP2.a3 XP2.a6 XP2.a7 XP2.a8 XP2.a9 XP2.a11 XP2.b3 XP2.b6 XP2.b7 XP2.b8 XP2.b9 XP2.b10 XP2.b11 XP2.b12 XP2.b13 XP2.b14 XP2.b15 XP2.b16 XP2.c3 XP2.c6 XP2.c7 XP2.c8 XP2.c9 XP2.c10 XP2.c11 XP2.c12 XP2.c13 XP2.c14 XP2.c15 XP2.c16 XP2.MH ZQ1.1 ZQ1.5

## Polygon pours and split planes (outlines as drawn)
GND on Top "GND_L01_P004" (solid, pour order 4): 0,0 63,0 63,80 0,80
GND on Top "GND_L01_P001" (solid, pour order 1): 0,80.25 0.25,80 63,80 63,0 0,0
GND on Bottom "GND_L02_P003" (solid, pour order 3): 63,80 0,80 0,0 63,0

## Other copper
Top:
  pour cut-out: 23.279,30.117 21.653,30.117 21.653,30.574 23.279,30.574

## Silkscreen, mask and mechanical layers (free items; w line width, h text height)
Top Overlay:
  text "RF_OUT" at -25.356,43.348 h3 r180
  text "RF_OUT" at -25.775,42.265 h3 r180
PCB Outline:
  lines w0.2: -37.425,7.715 -37.425,102.715

## Text inside footprints (layer, text, board x,y; h text height)
XP2: Top Overlay "A" at 57.251,60.832 h1 r270; Top Overlay "B" at 54.598,60.922 h1 r270; Top Overlay "C" at 52.008,60.971 h1 r270; Top Overlay "1" at 50.104,59.206 h1 r270; Top Overlay "8" at 50.213,41.482 h1 r270; Top Overlay "16" at 50.155,21.659 h1 r270; Bottom Overlay "A" at 57.237,60.207 h1 r270; Bottom Overlay "B" at 54.572,60.284 h1 r270; Bottom Overlay "C" at 52.01,60.297 h1 r270; Bottom Overlay "1" at 50.104,58.871 h1 r270; Bottom Overlay "8" at 50.203,40.851 h1 r270; Bottom Overlay "16" at 50.127,20.112 h1 r270; Comments "PCB edge" at 63.699,48.589 h2 r270
XW1: Comments "CONNECTOR FRONT" at -20.456,21.368 h1; Comments "INTERFACE" at -20.556,19.968 h1